# EAGLE board Implant 4.4 (EAGLE 7.3.0)
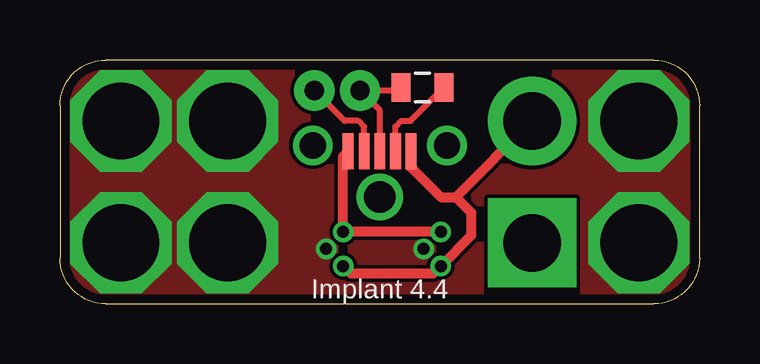
[diagram p0: board, top side]
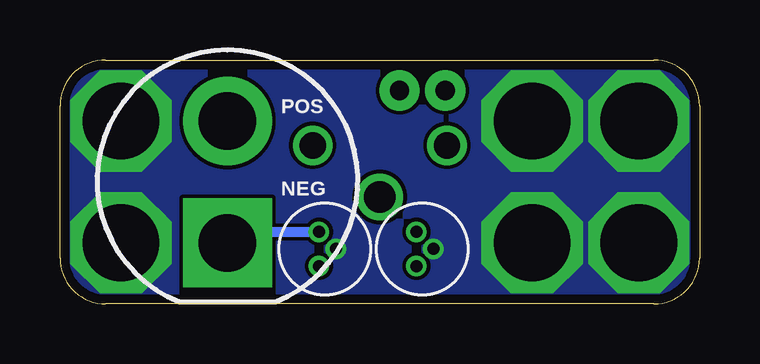
[diagram p1: board, bottom side, seen from below]

Size 26.67 x 10.16 mm. Coordinates in mm from the lower left corner, seen from the top.
Outline: 24.77,10.16 1.91,10.16 arc90 0,8.26 0,1.91 arc90 1.91,0 24.77,0 arc90 26.67,1.91 26.67,8.26 arc90 24.77,10.16
Copper layers (1*16): Top 0.0356mm / dielectric 1.5011mm / Bottom 0.0356mm
Design rules "OSH park": minimum track width 6mil, minimum drill 13mil, track to track 6mil, track to pad 6mil, pad to pad 6mil, via to via 6mil, smd to smd 6mil, copper to edge 15mil, drill to drill 6mil, minimum pad ring 7mil, minimum via ring 7mil, stop-mask expansion 3mil, vias tented up to drill 0mil, thermal gap 10mil

## Footprints (pad centres in the part's own frame; a part is rotated, then mirrored left to right if it is on the bottom)
1X02_SMALL = drill 0.8 pad 1.676: P$1 -0.953,0; P$2 0.953,0
LED10MM = drill 2.4 pad 3.7: A 2.54,0 | drill 2.4 pad 3.7 square: C -2.54,0
0805 = smd 0.8 x 1.2: 1 -0.9,0; 2 0.9,0
LASERDIODE = drill 0.5 pad 0.813: P$1 -0.711,0.254; P$2 0.711,0.254; P$3 0,-0.457
USB_VERT_MICRO_SMD = smd 0.45 x 1.5: P1 -1.33,-0.25; P2 -0.65,-0.25; P3 0,-0.25; P4 0.65,-0.25; P5 1.3,-0.25 | drill 1.1: P$1 -2.8,0; P$2 2.8,0 | drill 1.3: P$3 0,-2.15

## Placement (x,y rotation side)
JP1  M02SMALL  [1X02_SMALL]  11.56,8.89 180 top
LED1  [LED10MM]  19.68,5.08 90 bottom
R2  6.8k  [0805]  15.11,9.02 180 top
U$1  LASERDIODE  [LASERDIODE]  15.62,2.29 90 bottom
U$2  USB_SOCKET_MICRO_VERT  [USB_VERT_MICRO_SMD]  13.34,6.6 0 top
U$3  LASERDIODE  [LASERDIODE]  11.56,2.29 90 bottom

## Library data of the parts
JP1 = SparkFun-Connectors
LED1 R2 U$1-U$3 = Andy-library

## Nets
HEATSINK: U$1.P$3 U$3.P$3
LD+: LED1.A U$1.P$1 U$2.P5 U$3.P$1
LD-: LED1.C U$1.P$2 U$2.P1 U$3.P$2
N$1: R2.1 U$2.P4
N$3: JP1.P$2 U$2.P2
N$4: JP1.P$1 R2.2 U$2.P3

## Tracks (layer width: path | path; a pad name or v marks a point on that pad's centre or on a via)
HEATSINK  (via drill 3.2)
  other vias: 2.54,7.62 6.99,7.62 2.54,2.54 6.99,2.54 24.13,7.62 24.13,2.54
  pour Bottom: -3.17,15.24 32.38,15.24 32.38,-4.45 -3.17,-4.45
  pour Top: -1.91,14.61 30.48,14.61 30.48,-3.17 -1.91,-3.17
LD+
  Top 0.406: U$3.P$1 12.12,1.27 15.57,1.27 U$1.P$1 17.14,2.85 17.14,3.81 16.51,4.45 | U$2.P5 14.63,5.68 15.88,4.45 16.51,4.45 | LED1.A 16.51,4.45
LD-
  Top 0.406: U$1.P$2 U$3.P$2 11.81,6.16 U$2.P1
  Bottom 0.406: LED1.C 19.23,3 U$1.P$2
N$1
  Top 0.254: U$2.P4 13.98,7.38 14.22,7.62 14.62,7.62 R2.1
N$3
  Top 0.254: U$2.P2 12.69,7.38 12.45,7.62 11.87,7.62 JP1.P$2
N$4
  Top 0.254: U$2.P3 13.34,8.06 JP1.P$1 14.09,8.89 R2.2

## Text on the board
tNames: Implant 4.4
bNames: POS | NEG